# EAGLE board Board (EAGLE 6.6.0)
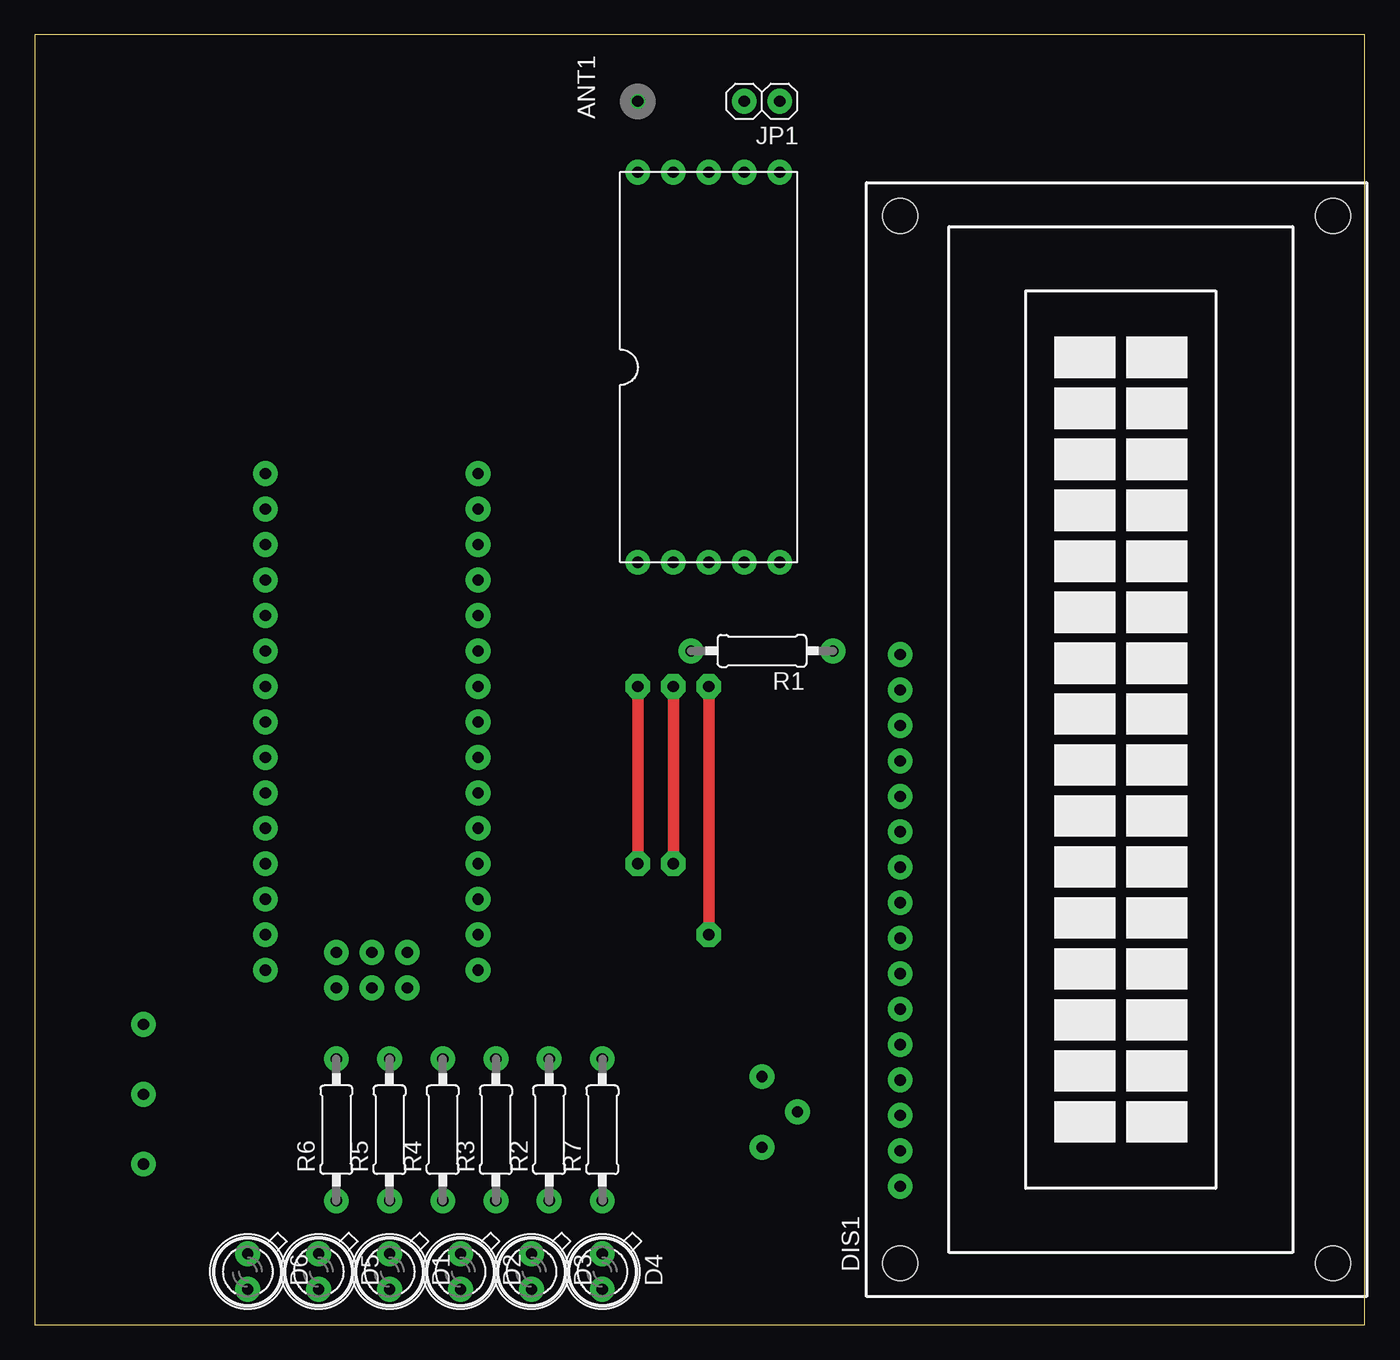
[diagram p0: board, top side]
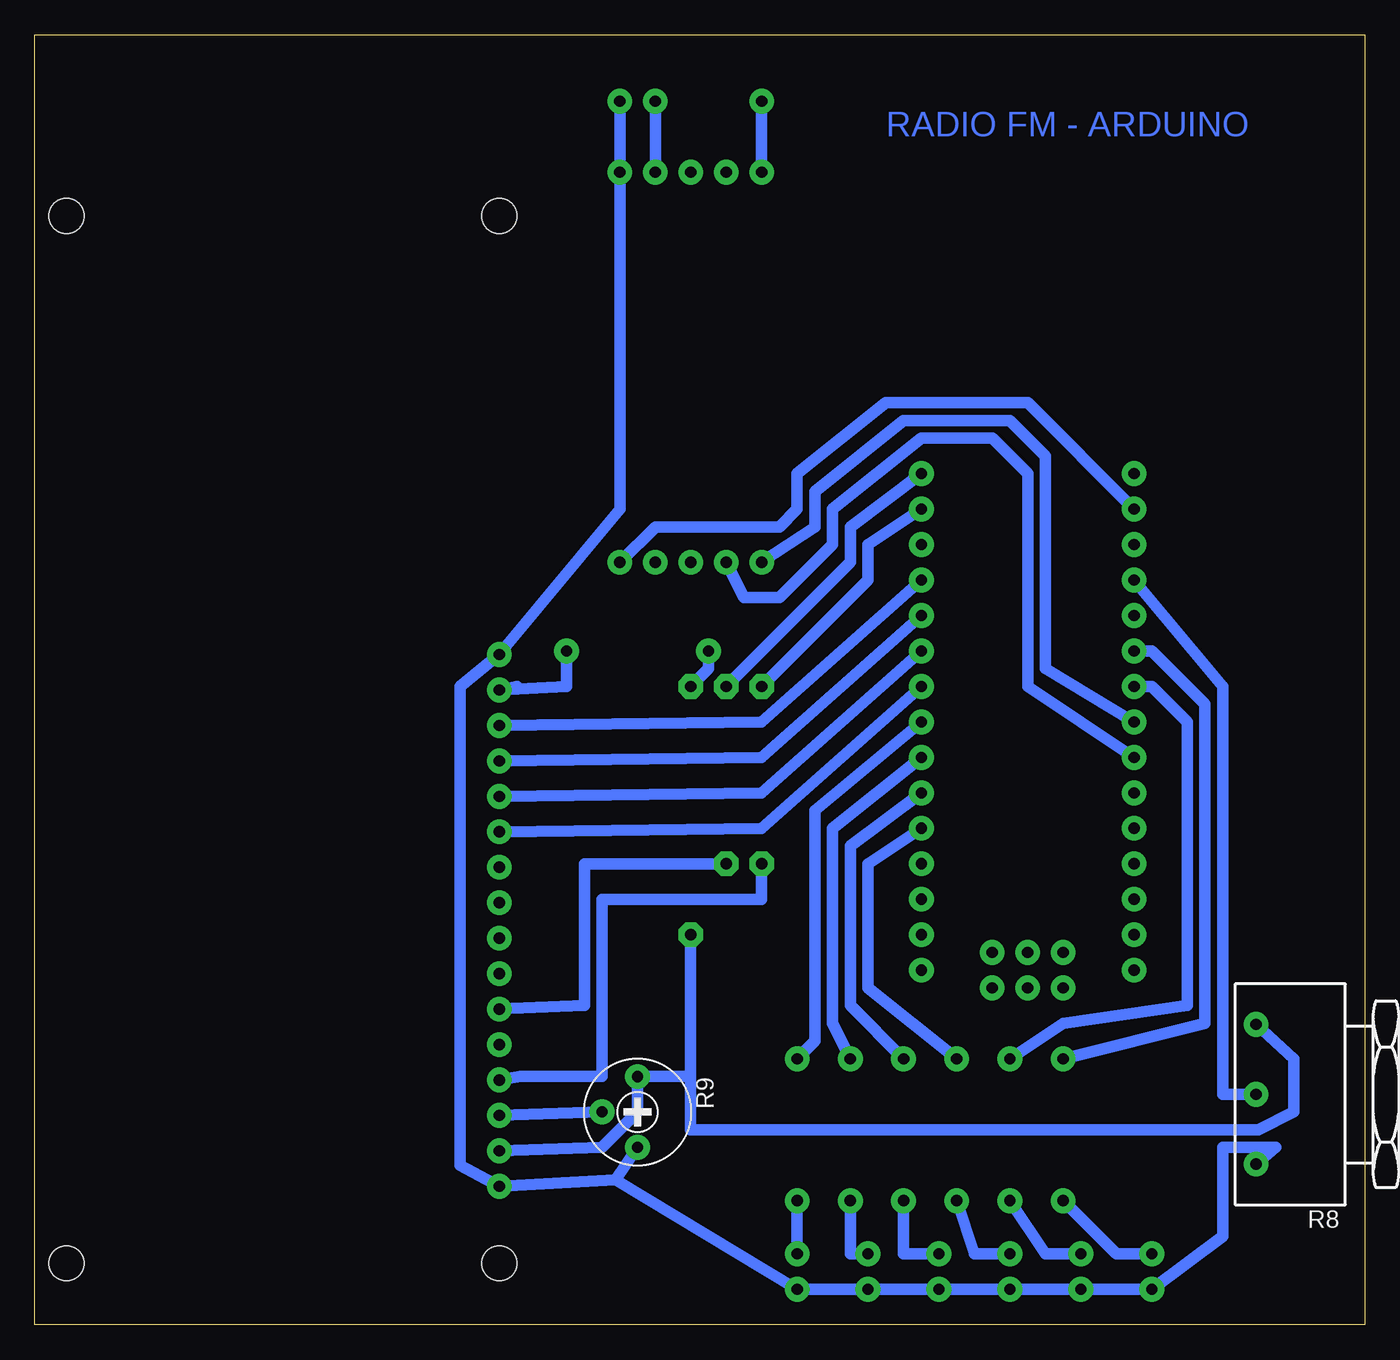
[diagram p1: board, bottom side, seen from below]

Size 95.23 x 92.38 mm. Coordinates in mm from the lower left corner, seen from the top.
Outline: 0,0 95.23,0 95.23,92.38 0,92.38 0,0
Copper layers (1*16): Top 0.035mm / dielectric 1.5mm / Bottom 0.035mm
Design rules "default": minimum track width 10mil, minimum drill 24mil, track to track 8mil, track to pad 8mil, pad to pad 8mil, via to via 8mil, smd to smd 8mil, copper to edge 40mil, drill to drill 8mil, minimum pad ring 10mil, minimum via ring 8mil, stop-mask expansion 4mil, vias tented up to drill 0mil, thermal gap 10mil

## Footprints (pad centres in the part's own frame; a part is rotated, then mirrored left to right if it is on the bottom)
PAD-01 = drill 0.8 pad 1.778: 1 0,0
SFH482 = drill 0.8 pad 1.778: A -1.27,0; K 1.27,0
TUXGR_16X2_R2 = drill 0.8 pad 1.778: 1 -32,15.5; 2 -29.46,15.5; 3 -26.92,15.5; 4 -24.38,15.5; 5 -21.84,15.5; 6 -19.3,15.5; 7 -16.76,15.5; 8 -14.22,15.5; 9 -11.68,15.5; 10 -9.14,15.5; 11 -6.6,15.5; 12 -4.06,15.5; 13 -1.52,15.5; 14 1.02,15.5; 15 3.56,15.5; 16 6.1,15.5 | hole 2.5: -37.5,-15.5; 37.5,-15.5; -37.5,15.5; 37.5,15.5
1X02 = drill 0.8 pad 1.778: 1 -1.27,0; 2 1.27,0
0207/10 = drill 0.813 pad 1.778: 1 -5.08,0; 2 5.08,0
PC16S = drill 0.8 pad 1.778: 1A -5,6.5; 1E 5,6.5; 1S 0,6.5
RTRIM3339P = drill 0.8 pad 1.778: 1 -2.54,0; 2 0,-2.54; 3 2.54,0
NANO = drill 0.8 pad 1.778: 3.3V -10.16,24.13; 5V -10.16,-1.27; A0 -10.16,19.05; A1 -10.16,16.51; A2 -10.16,13.97; A3 -10.16,11.43; A4 -10.16,8.89; A5 -10.16,6.35; A6 -10.16,3.81; A7 -10.16,1.27; AREF -10.16,21.59; D2 5.08,1.27; D3 5.08,3.81; D4 5.08,6.35; D5 5.08,8.89; D6 5.08,11.43; D7 5.08,13.97; D8 5.08,16.51; D9 5.08,19.05; D10 5.08,21.59; D11 5.08,24.13; D12 5.08,26.67; D13 -10.16,26.67; GND -10.16,-6.35; GND1 5.08,-1.27; ICSP1 -5.08,-10.16; ICSP2 -5.08,-7.62; ICSP3 -2.54,-10.16; ICSP4 -2.54,-7.62; ICSP5 0,-10.16; ICSP6 0,-7.62; RAW -10.16,-8.89; RST -10.16,-3.81; RST1 5.08,-3.81; RX1 5.08,-6.35; TX0 5.08,-8.89
RDA5807 = drill 0.8 pad 1.778: P$1 -41.91,3.81; P$2 -41.91,1.27; P$3 -41.91,-1.27; P$4 -41.91,-3.81; P$5 -41.91,-6.35; P$6 -13.97,-6.35; P$7 -13.97,-3.81; P$8 -13.97,-1.27; P$9 -13.97,1.27; P$10 -13.97,3.81

## Placement (x,y rotation side)
ANT1  [PAD-01]  43.18,87.63 90 top
D1  SFH482  [SFH482]  25.4,3.81 270 top
D2  SFH482  [SFH482]  30.48,3.81 270 top
D3  SFH482  [SFH482]  35.56,3.81 270 top
D4  SFH482  [SFH482]  40.64,3.81 270 top
D5  SFH482  [SFH482]  20.32,3.81 270 top
D6  SFH482  [SFH482]  15.24,3.81 270 top
DIS1  TUXGR_16X2_R2  [TUXGR_16X2_R2]  77.47,41.91 90 top
JP1  [1X02]  52.07,87.63 180 top
R1  [0207/10]  52.07,48.26 180 top
R2  [0207/10]  36.83,13.97 90 top
R3  [0207/10]  33.02,13.97 90 top
R4  [0207/10]  29.21,13.97 90 top
R5  [0207/10]  25.4,13.97 90 top
R6  [0207/10]  21.59,13.97 90 top
R7  [0207/10]  40.64,13.97 90 top
R8  PC16S  [PC16S]  1.27,16.51 90 bottom
R9  [RTRIM3339P]  52.07,15.24 270 bottom
U$1  NANO  [NANO]  26.67,34.29 0 top
U$3  RDA5807  [RDA5807]  46.99,96.52 90 top

## Library data of the parts
ANT1 = discrete
D1-D6 = led
DIS1 = display-lcd; OC_FARNELL: unknown; OC_NEWARK: unknown
JP1 = pinhead
R1-R7 = resistor
R8 = piher; OC_FARNELL: 4452940; OC_NEWARK: unknown
R9 = resistor6
U$1 = Arduino-clone
U$3 = rda5807

## Nets
GND: D1.K D2.K D3.K D4.K D5.K D6.K DIS1.1 DIS1.16 JP1.1 R8.1A R9.3 U$3.P$6
N$1: D6.A R6.1
N$2: D5.A R5.1
N$3: D1.A R4.1
N$4: D2.A R3.1
N$5: D3.A R2.1
N$6: D4.A R7.1
N$7: DIS1.11 U$1.D6
N$8: U$1.A5 U$3.P$2
N$9: JP1.2 U$3.P$7
N$10: DIS1.12 U$1.D7
N$11: R8.1S U$1.A0
N$12: DIS1.13 U$1.D8
N$13: DIS1.14 U$1.D9
N$14: DIS1.3 R9.2
N$15: DIS1.6 U$1.D12
N$16: DIS1.4 U$1.D11
N$17: R4.2 U$1.D2
N$18: R3.2 U$1.D3
N$19: R2.2 U$1.D4
N$20: R7.2 U$1.D5
N$21: R5.2 U$1.A3
N$22: R6.2 U$1.A2
N$24: DIS1.15 R1.1
N$28: U$1.3.3V U$3.P$5
N$29: ANT1.1 U$3.P$10
N$33: U$1.A4 U$3.P$1
VSS: DIS1.2 R1.2 R8.1E R9.1

## Tracks (layer width: path | path; a pad name or v marks a point on that pad's centre or on a via)
GND
  Bottom 0.813: 53.65,10.37 D4.K D3.K D2.K D1.K D5.K D6.K 10.16,6.35 10.16,12.7 6.35,12.7 R8.1A | 53.65,10.37 DIS1.1 64.77,11.43 64.77,45.72 DIS1.16 53.34,58.42 U$3.P$6 JP1.1 | 53.65,10.37 R9.3
N$1
  Bottom 0.813: R6.1 17.78,5.08 D6.A
N$2
  Bottom 0.813: R5.1 22.86,5.08 D5.A
N$3
  Bottom 0.813: R4.1 27.94,5.08 D1.A
N$4
  Bottom 0.813: R3.1 33.02,5.08 D2.A
N$5
  Bottom 0.813: R2.1 36.83,5.08 D3.A
N$6
  Bottom 0.813: R7.1 D4.A
N$7
  Bottom 0.813: DIS1.11 43.18,35.56 U$1.D6
N$8
  Bottom 0.813: U$1.A5 24.13,45.72 24.13,60.96 26.67,63.5 31.75,63.5 38.1,58.42 38.1,55.88 41.91,52.07 44.45,52.07 U$3.P$2
N$9
  Bottom 0.813: JP1.2 U$3.P$7
N$10
  Bottom 0.813: DIS1.12 43.18,38.1 U$1.D7
N$11
  Bottom 0.813: R8.1S 10.16,16.51 10.16,45.72 U$1.A0
N$12
  Bottom 0.813: DIS1.13 43.18,40.64 U$1.D8
N$13
  Bottom 0.813: DIS1.14 43.18,43.18 U$1.D9
N$14
  Bottom 0.813: R9.2 DIS1.3
N$15  (via drill 0.8 pad 1.78)
  Top 0.813: v45.72,45.72 v45.72,33.02
  Bottom 0.813: v45.72,33.02 55.88,33.02 55.88,22.86 DIS1.6 | U$1.D12 36.83,57.15 36.83,54.61 v45.72,45.72
N$16  (via drill 0.8 pad 1.78)
  Top 0.813: v43.18,45.72 v43.18,33.02
  Bottom 0.813: v43.18,33.02 43.18,30.48 54.61,30.48 54.61,17.78 60.45,17.78 DIS1.4 | U$1.D11 35.56,55.88 35.56,53.34 v43.18,45.72
N$17
  Bottom 0.813: U$1.D2 35.56,33.02 35.56,24.13 R4.2
N$18
  Bottom 0.813: U$1.D3 36.83,34.29 36.83,22.86 R3.2
N$19
  Bottom 0.813: U$1.D4 38.1,35.56 38.1,21.59 R2.2
N$20
  Bottom 0.813: U$1.D5 39.37,36.83 39.37,20.32 R7.2
N$21
  Bottom 0.813: U$1.A3 15.24,45.72 12.7,43.18 12.7,22.86 21.59,21.59 R5.2
N$22
  Bottom 0.813: R6.2 11.43,21.59 11.43,44.45 15.24,48.26 U$1.A2
N$24
  Bottom 0.813: 60.7,45.72 DIS1.15 57.15,45.72 R1.1
N$28
  Bottom 0.813: U$1.3.3V 24.13,66.04 34.29,66.04 40.64,60.96 40.64,58.42 41.91,57.15 50.8,57.15 U$3.P$5
N$29
  Bottom 0.813: ANT1.1 U$3.P$10
N$33
  Bottom 0.813: U$1.A4 22.86,46.99 22.86,62.23 25.4,64.77 33.02,64.77 39.37,59.69 39.37,57.15 U$3.P$1
VSS  (via drill 0.8 pad 1.78)
  Top 0.813: v48.26,45.72 v48.26,27.94
  Bottom 0.813: R8.1E 5.08,19.05 5.08,15.24 7.62,13.97 48.26,13.97 48.26,17.78 | v48.26,27.94 48.26,17.78 | DIS1.2 54.61,12.7 52.07,15.24 R9.1 48.26,17.78 | v48.26,45.72 46.99,46.99 R1.2

## Text on the board
Bottom: RADIO FM - ARDUINO